# Altium PCB PCB-LabRoc.PcbDoc
Units mil, origin at the board's own origin, x right, y up, seen from the top; angles counter-clockwise.
Board outline 6000 x 4000 mil, 2 copper layers (Top Layer, Bottom Layer); 23 components, 20 nets, 86 pads, 0 vias.
Unrouted connection lines stored in the file: 45.
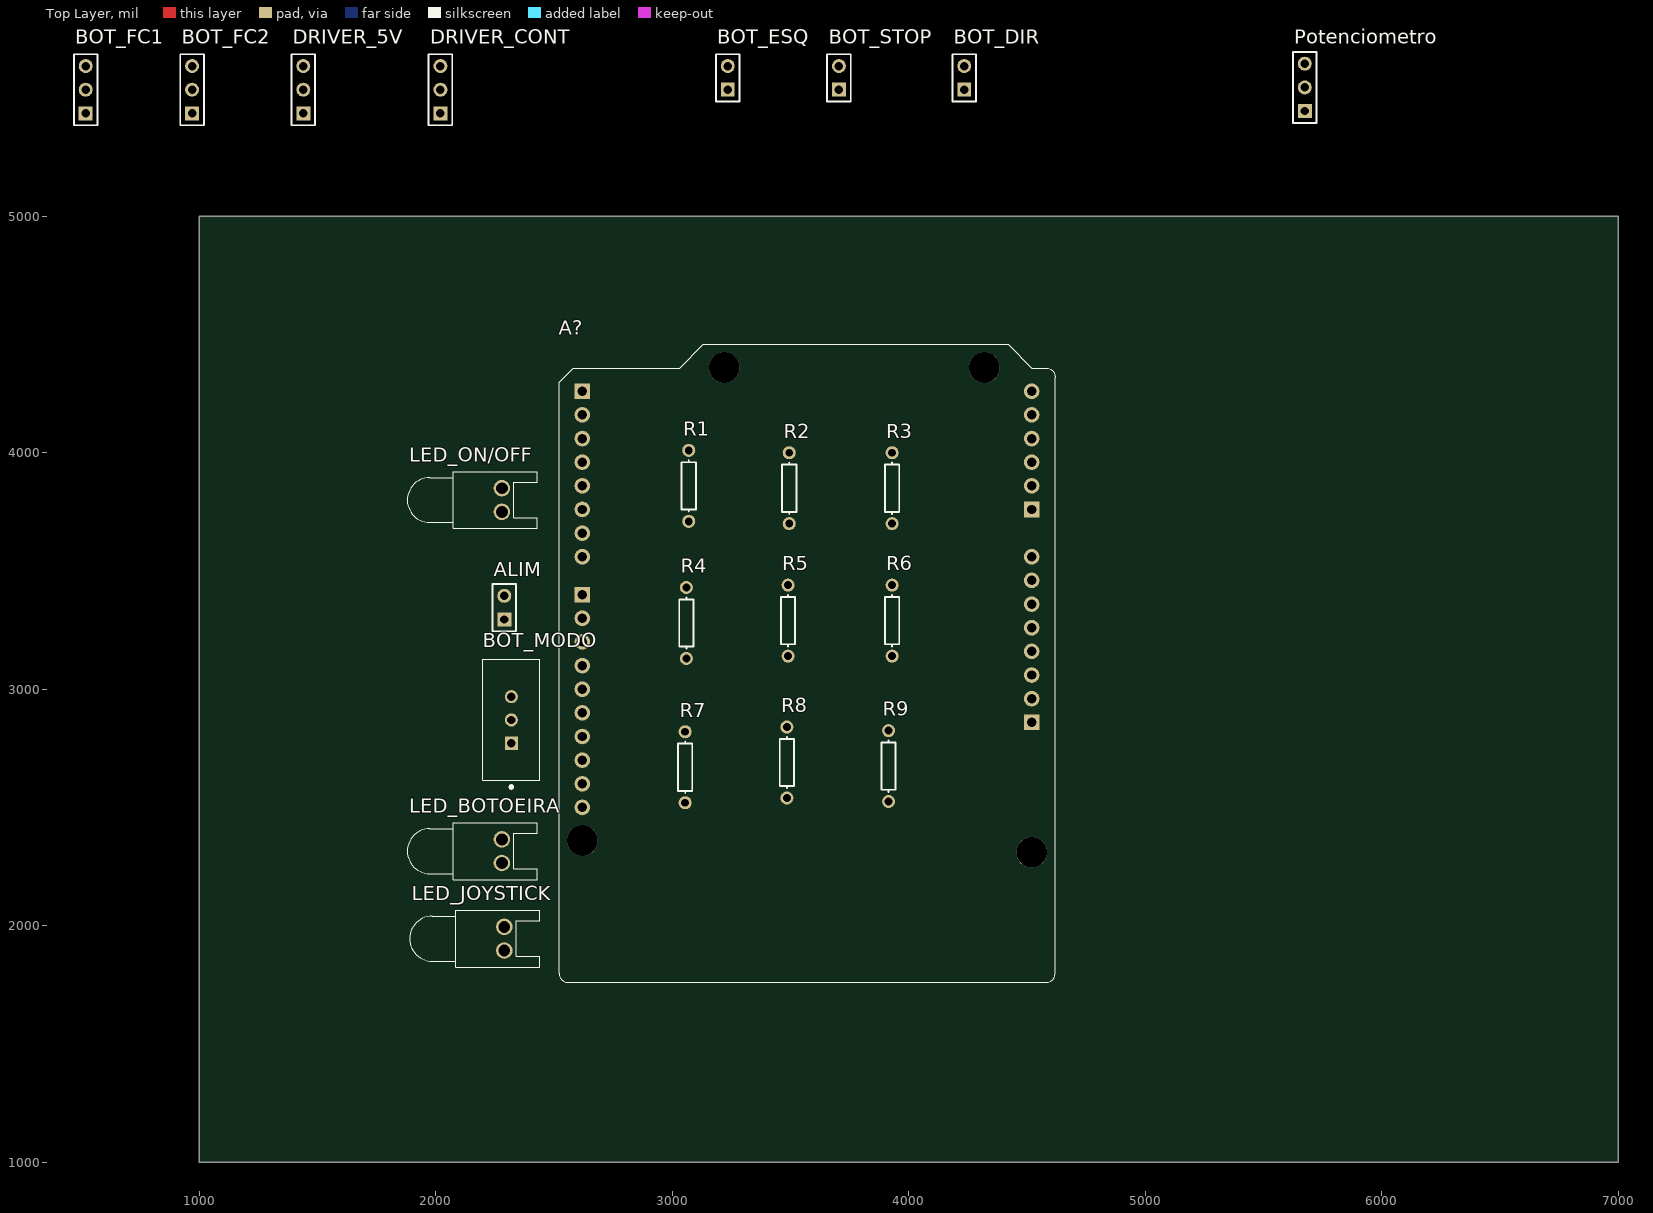
[diagram p0: Top Layer view]
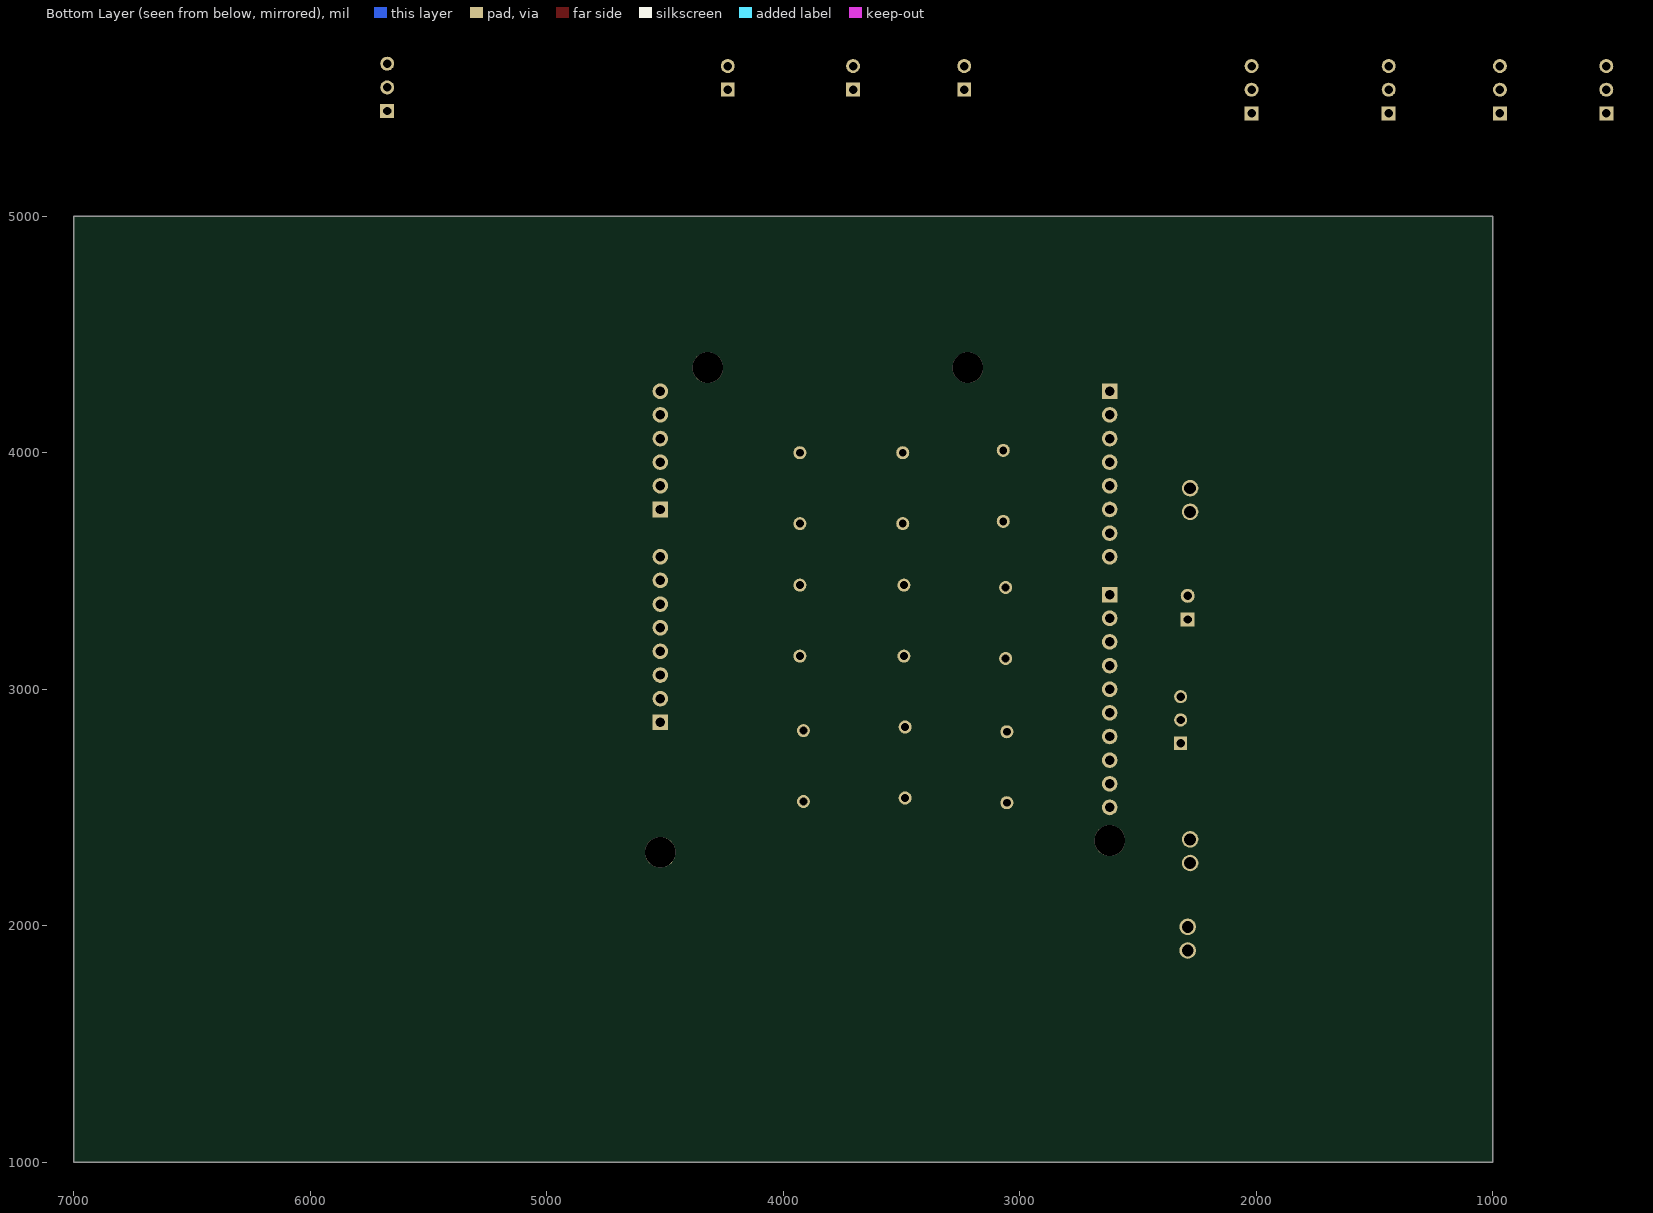
[diagram p1: Bottom Layer view, seen from below]

## Layer stack, top to bottom
Top Solder: solder mask 0.4, Solder Resist, Dk 3.5
Top Layer: signal copper 1.4
Dielectric 1: dielectric 12.6, FR-4, Dk 4.8
Bottom Layer: signal copper 1.4
Bottom Solder: solder mask 0.4, Solder Resist, Dk 3.5

## Board outline
1000,1000 7000,1000 7000,5000 1000,5000

## Design rules (kind name [scope] priority, off if disabled: settings)
Clearance [All] p1: gap=10 ignorepadtopadclearanceinfootprint=FALSE except(0: Arc-Hole Track-Hole SMDPad-Hole THPad-Hole Via-Hole Fill-Hole Poly-Hole Region-Hole Text-Hole)
PolygonConnect [All] p1: connectstyle=Relief reliefconductorwidth=10 reliefentries=4 polygonreliefangle="90 Angle" airgapwidth=10
RoutingVias [All] p1: holewidth=28 width=50 viastyle="Through Hole" minholewidth=28 minwidth=50 maxholewidth=28 maxwidth=50
SolderMaskExpansion [All] p1: expansion=4 istentingtop=FALSE
Width [All] p1: maxlimit=10 minlimit=10 preferedwidth=10
30 further rules are at their usual default settings.

## Classes and differential pairs
component class Sheet1: A? ALIM BOT_DIR BOT_ESQ BOT_FC1 BOT_FC2 BOT_MODO BOT_STOP DRIVER_5V DRIVER_CONT LED_BOTOEIRA LED_JOYSTICK LED_ON/OFF Potenciometro R1 R2 R3 R4 R5 R6 R8

## Components (designator, comment, footprint, x,y, rotation, side; value= is the part's Value field where it differs from the comment)
A? "A000066" ARDUINO_A000066 4620,1760 r90 top
ALIM "Header 2" HDR1X2 2290,3295 r90 top
BOT_DIR "Header 2" HDR1X2 4235,5535 r90 top
BOT_ESQ "Header 2" HDR1X2 3235,5535 r90 top
BOT_FC1 "Header 3" HDR1X3 520,5435 r90 top
BOT_FC2 "Header 3" HDR1X3 970,5435 r90 top
BOT_MODO "1825159-1" SW_1825159-1 2320,2870 r90 top
BOT_STOP "Header 2" HDR1X2 3705,5535 r90 top
DRIVER_5V "Header 3" HDR1X3 1440,5435 r90 top
DRIVER_CONT "Header 3" HDR1X3 2020,5435 r90 top
LED_BOTOEIRA "LED0" LED-0 2280,2315 r270 top
LED_JOYSTICK "LED0" LED-0 2290,1945 r270 top
LED_ON/OFF "LED0" LED-0 2280,3800 r270 top
Potenciometro "Header 3" HDR1X3 5675,5445 r90 top
R1 "Res1" AXIAL-0.3 3070,3860 r270 top value=10K
R2 "Res1" AXIAL-0.3 3495,3850 r270 top value=10K
R3 "Res1" AXIAL-0.3 3930,3850 r270 top value=10K
R4 "Res1" AXIAL-0.3 3060,3280 r90 top value=10K
R5 "Res1" AXIAL-0.3 3490,3290 r270 top value=1K
R6 "Res1" AXIAL-0.3 3930,3290 r270 top value=1K
R7 "Res1" AXIAL-0.3 3055,2670 r90 top value=1K
R8 "Res1" AXIAL-0.3 3485,2690 r270 top value=1K
R9 "Res1" AXIAL-0.3 3915,2675 r90 top value=1K

## Footprints (in the part's own frame and the unit in brackets; to place one, negate y for a bottom-side part, rotate by r counter-clockwise, add the part's x,y. Pads: shape width x height; smd on the part's side, far side on the other; paste and mask are expansions set on the pad)
ARDUINO_A000066 [mil]
  round 66 hole 40: 3V3(1400,100) 5V(1500,100) A1(2100,100) A2(2200,100) A3(2300,100) A4(2400,100) A4(SDA)(840,2000) A5(2500,100) A5(SCL)(740,2000) AREF(940,2000) D1(2400,2000) D2(2300,2000) D3(2200,2000) D4(2100,2000) D5(2000,2000) D6(1900,2000) D7(1800,2000) D9(1540,2000) D10(1440,2000) D11(1340,2000) D12(1240,2000) D13(1140,2000) GND_1(1700,100) GND_2(1600,100) GND_3(1040,2000) IOREF(1200,100) RST(1300,100) VIN(1800,100)
  rect 66x66 / inner round 66 / far side rect 66x66 hole 40: A0(2000,100) D0(2500,2000) D8(1640,2000) P1(1100,100)
  round 129.92 hole 129.92 unplated: ""(550,100) ""(600,2000) ""(2600,300) ""(2600,1400)
  silkscreen extent 0,0 2698,2098, body extent -1606,-1050 1350,1050, height 467
AXIAL-0.3 [mm] "Axial Device, Thru-Hole; 2 Leads; 0.3 in Pin Spacing"
  round 1.4 hole 0.85: 1(-3.81,0) 2(3.81,0)
  silkscreen extent -2.77,-0.76 2.77,0.76
HDR1X2 [mm] "Connector; Header; 2 Position"
  rect 1.5x1.5 hole 0.9: 1(0,0)
  round 1.5 hole 0.9: 2(2.54,0)
  silkscreen extent -1.27,-1.27 3.81,1.27
HDR1X3 [mm] "Connector; Header; 3 Position"
  rect 1.5x1.5 hole 0.9: 1(0,0)
  round 1.5 hole 0.9: 2(2.54,0) 3(5.08,0)
  silkscreen extent -1.27,-1.27 6.35,1.27
LED-0 [mil] "LED; 2 Leads"
  round 70 hole 50: 1(50,0) 2(-50,0)
  silkscreen extent -120,-400 120,150
SW_1825159-1 [mm]
  rect 1.408x1.408 / inner round 1.408 / far side rect 1.408x1.408 hole 0.9: 1(-2.5,0)
  round 1.408 hole 0.9: 2(0,0) 3(2.5,0)
  silkscreen extent -7.35,-3.05 6.5,3.05

## Part data
A?: Package="Non-Standard Arduino", Availability="In Stock", Check_prices=https://www.snapeda.com/parts/A000066/Arduino/view-part/?ref=eda, MF=Arduino, MP=A000066, Price=None, Purchase-URL=https://pricing.snapeda.com/search/part/A000066/?ref=eda, SnapEDA_Link=https://www.snapeda.com/parts/A000066/Arduino/view-part/?ref=snap
ALIM BOT_DIR BOT_ESQ BOT_STOP: "Header, 2-Pin", LatestRevisionDate=17-Jul-2002, LatestRevisionNote="Re-released for DXP Platform.", Publisher="Altium Limited"
BOT_FC1 BOT_FC2 DRIVER_5V DRIVER_CONT Potenciometro: "Header, 3-Pin", LatestRevisionDate=17-Jul-2002, LatestRevisionNote="Re-released for DXP Platform.", Publisher="Altium Limited"
BOT_MODO: "Slide Switch SPDT Through Hole", Contact_Current_Rating=".25 A", Package=None, Availability="In Stock", Check_prices=https://www.snapeda.com/parts/1825159-1/TE+Connectivity+ALCOSWITCH+Switches/view-part/?ref=eda, Configuration_Pole-Throw="Single Pole - Double Throw", EU_RoHS_Compliance=Compliant, MF="TE Connectivity", MP=1825159-1, Price=None, Purchase-URL=https://pricing.snapeda.com/search/part/1825159-1/?ref=eda, SnapEDA_Link=https://www.snapeda.com/parts/1825159-1/TE+Connectivity+ALCOSWITCH+Switches/view-part/?ref=snap, Switch_Type=Slide
LED_BOTOEIRA LED_JOYSTICK LED_ON/OFF: "Typical INFRARED GaAs LED", LatestRevisionDate=08-Jul-2005, LatestRevisionNote="Mech Layer 1 removed.", PackageDescription="LED; 2 Leads", PackageReference=LED-0, Published=8-Jun-2000, Publisher="Altium Limited"
R1 R2 R3 R4 R5 R6 R7 R8 R9: "Resistor", LatestRevisionDate=17-Jul-2002, LatestRevisionNote="Re-released for DXP Platform.", PackageDescription="Axial Device, Thru-Hole; 2 Leads; 0.3 in Pin Spacing", PackageReference=AXIAL-0.3, Published=8-Jun-2000, Publisher="Altium Limited"

## Nets (pads, with @x,y where several pads share a name; then routed paths per layer and width w, separated by ;. In a path a pad name is that pad's centre, name@x,y a point inside that pad or via, vN(x,y) a via of type N, cw(c..) or ccw(c..) an arc to the next point about the centre after c; other vN are vias at no path point)
5V: A?.5V BOT_DIR.1 BOT_ESQ.1 BOT_MODO.2 BOT_STOP.1 DRIVER_5V.1 DRIVER_5V.2 DRIVER_5V.3 Potenciometro.3 R5.2 R6.2 R7.1
9V: A?.VIN ALIM.2
Bot_Dir: A?.D8 BOT_DIR.2 R3.2
Bot_Esq: A?.D5 BOT_ESQ.2 R1.2
Bot_Fc1: A?.D10 BOT_FC1.2
Bot_Fc2: A?.D12 BOT_FC2.2
Bot_Modo: A?.D7 BOT_MODO.3 R4.1
Bot_Stop: A?.D4 BOT_STOP.2 R2.2
Dir: A?.D6 DRIVER_CONT.1
EN: A?.D11 DRIVER_CONT.3
GND: A?.GND_1 A?.GND_2 ALIM.1 BOT_FC1.1 BOT_FC2.1 LED_BOTOEIRA.2 LED_JOYSTICK.2 LED_ON/OFF.2 Potenciometro.1 R1.1 R2.1 R3.1 R4.2
Led_Bot: A?.D0 R8.1
Led_Joy: A?.D1 R9.1
NetBOT_FC1_3: BOT_FC1.3 R5.1
NetBOT_FC2_3: BOT_FC2.3 R6.1
NetLED_BOTOEIRA_1: LED_BOTOEIRA.1 R8.2
NetLED_JOYSTICK_1: LED_JOYSTICK.1 R9.2
NetLED_ON/OFF_1: LED_ON/OFF.1 R7.2
Poten: A?.A0 Potenciometro.2
Step: A?.D9 DRIVER_CONT.2
pads on no net: A?. A?.3V3 A?.A1 A?.A2 A?.A3 A?.A4 A?.A4(SDA) A?.A5 A?.A5(SCL) A?.AREF A?.D2 A?.D3 A?.D13 A?.GND_3 A?.IOREF A?.P1 A?.RST BOT_MODO.1